# EAGLE board ArduRCT_Local-v4 (EAGLE 5.07)
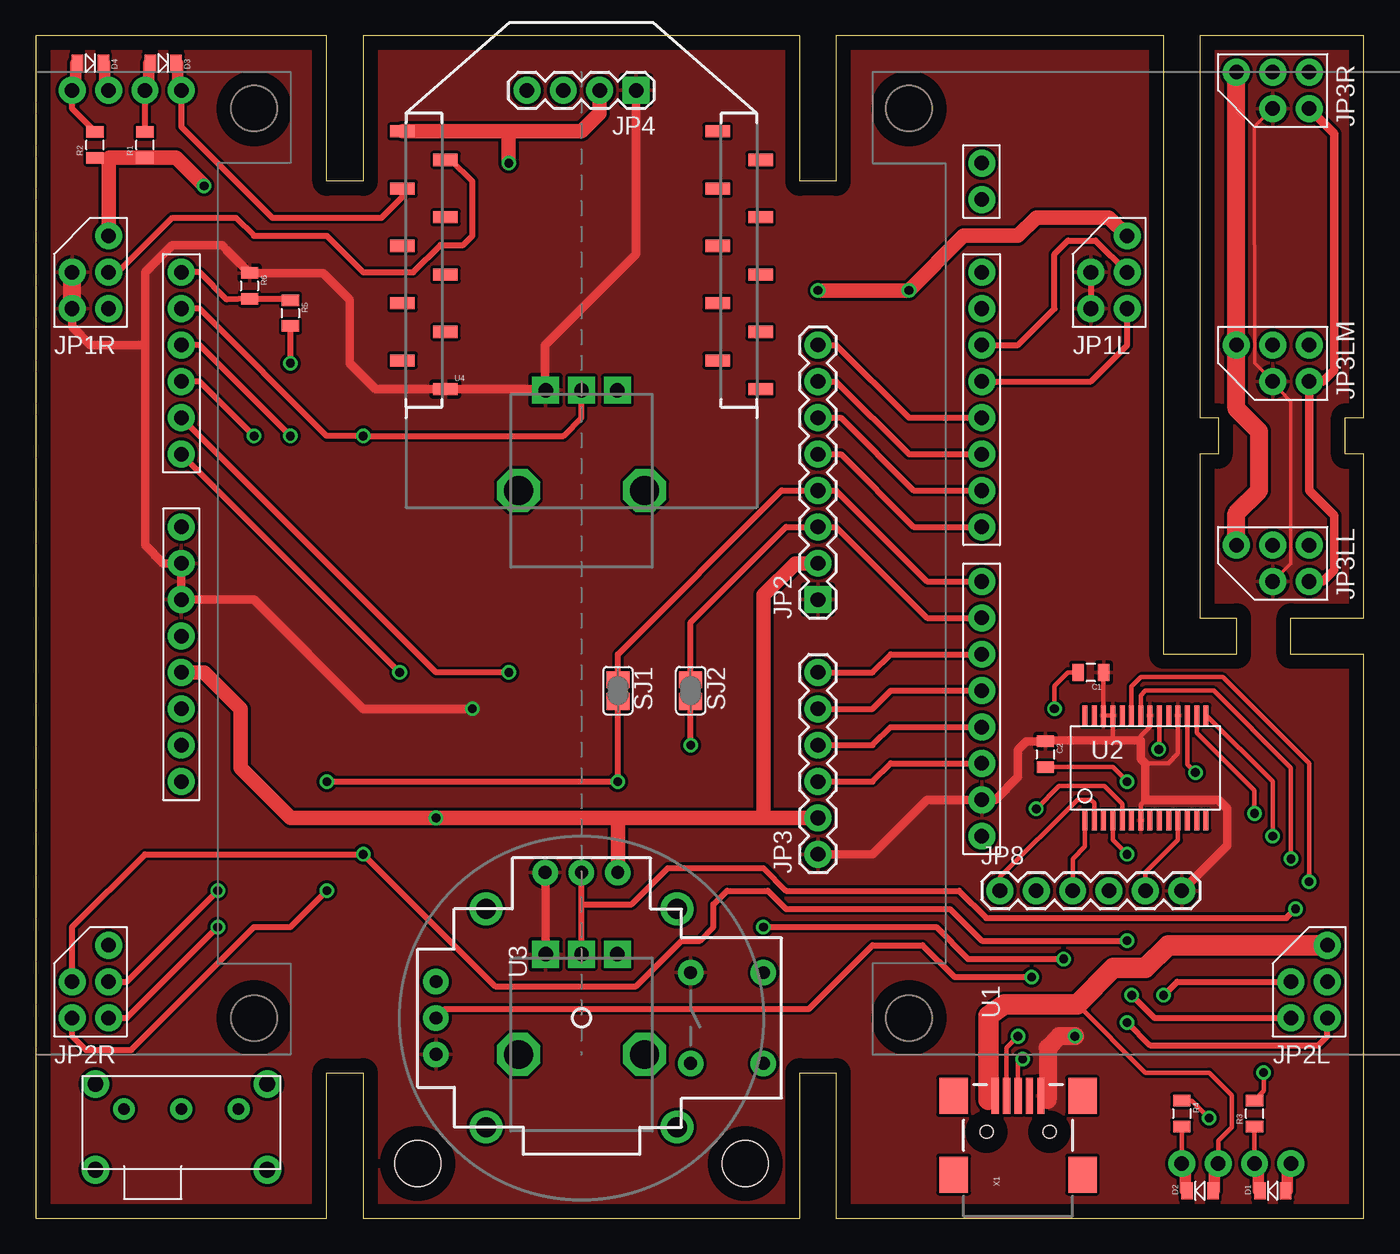
[diagram p0: board, top side]
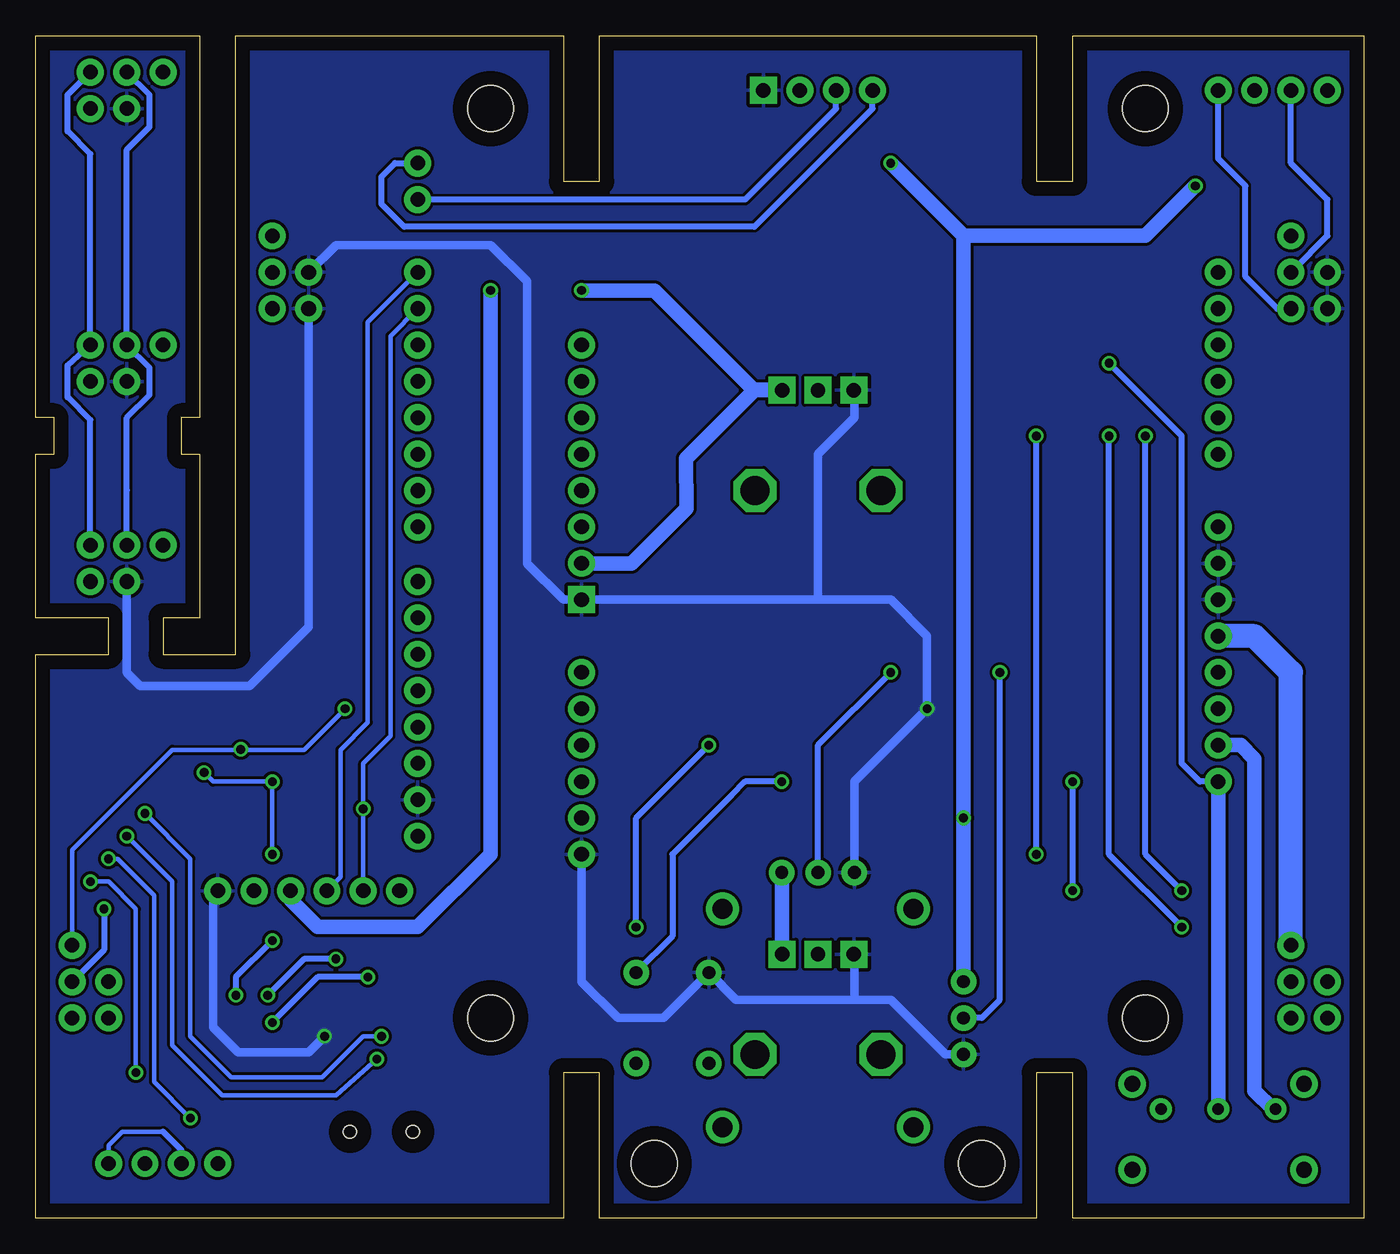
[diagram p1: board, bottom side, seen from below]

Size 92.71 x 82.55 mm. Coordinates in mm from the lower left corner, seen from the top.
Outline: 0,0 20.32,0 20.32,10.16 22.86,10.16 22.86,0 53.34,0 53.34,10.16 55.88,10.16 55.88,0 92.7,0 92.71,39.37 87.63,39.37 87.63,41.91 92.71,41.91 92.71,53.34 91.44,53.34 91.44,55.88 92.71,55.88 92.71,82.54 81.28,82.54 81.28,55.88 82.55,55.88 82.55,53.34 81.28,53.34 81.28,41.91 83.82,41.91 83.82,39.37 78.74,39.37 78.74,82.55 55.88,82.55 55.88,72.39 53.34,72.39 53.34,82.55 22.86,82.55 22.86,72.39 20.32,72.39 20.32,82.54 0,82.54 0,0
Copper layers (1*16): Top 0.035mm / dielectric 1.5mm / Bottom 0.035mm
Design rules "default": minimum track width 10mil, minimum drill 24mil, track to track 8mil, track to pad 8mil, pad to pad 8mil, via to via 8mil, smd to smd 8mil, copper to edge 40mil, drill to drill 8mil, minimum pad ring 10mil, minimum via ring 8mil, stop-mask expansion 4mil, vias tented up to drill 0mil, thermal gap 10mil
Net classes: 0 default: width 0.203 mm; 1 vcc: width 0.254 mm
Holes 3.2 mm at 15.24,13.97 60.96,13.97 60.96,77.47 15.24,77.47 49.53,3.81 26.67,3.81

## Footprints (pad centres in the part's own frame; a part is rotated, then mirrored left to right if it is on the bottom)
0805 = smd 0.8 x 1.2: 1 -0.9,0; 2 0.9,0
LED = smd 0.8 x 1.2: A -0.9,0; C 0.9,0 | drill 1.016 pad 1.88 round: A1 -1.27,-1.905; C1 1.27,-1.905
2+3 = drill 1.016 pad 1.88 round: 1 -1.27,0; 2 1.27,0; 3 1.27,2.54; 4 -1.27,2.54; 5 -3.81,2.54
1X08 = drill 1.016 pad 1.88 square: 1 0,0 | drill 1.016 pad 1.88 round: 2 2.54,0; 3 5.08,0; 4 7.62,0; 5 10.16,0; 6 12.7,0; 7 15.24,0; 8 17.78,0
1X06 = drill 1.016 pad 1.88 round: 1 0,0; 2 2.54,0; 3 5.08,0; 4 7.62,0; 5 10.16,0; 6 12.7,0
1X04 = drill 1.016 pad 1.88 square: 1 0,0 | drill 1.016 pad 1.88 round: 2 2.54,0; 3 5.08,0; 4 7.62,0
ALPS_POT = drill 1 pad 1.88 square: P$1 7,-2.5; P$2 7,0; P$3 7,2.5 | drill 2 octagon: P$4 0,-4.4; P$5 0,4.4
EG1224 = drill 0.8 pad 1.524 round: 1 -4,0; 2 0,0; 3 4,0 | drill 1.1 pad 1.93 round: P$4 6,1.75; P$5 -6,1.75; P$6 -6,-4.25; P$7 6,-4.25
SJ = smd 1.168 x 1.6: 1 -0.762,0; 2 0.762,0
ARDUTS_SHIELD_SPLIT = drill 1.016 pad 1.88 round: 3.3V -27.94,-8.89; 5V -27.94,-6.35; A0 -27.94,6.35; A1 -27.94,8.89; A2 -27.94,11.43; A3 -27.94,13.97; A4 -27.94,16.51; A5 -27.94,19.05; AREF 27.94,-20.32; D2 27.94,13.97; D3 27.94,11.43; D4 27.94,8.89; D5 27.94,6.35; D6 27.94,3.81; D7 27.94,1.27; D8 27.94,-2.54; D9 27.94,-5.08; D10 27.94,-7.62; D11 27.94,-10.16; D12 27.94,-12.7; D13 27.94,-15.24; D19 27.94,26.67; D20 27.94,24.13; GND@0 -27.94,-3.81; GND@1 -27.94,-1.27; GND@2 27.94,-17.78; RES -27.94,-11.43; RX 27.94,19.05; TX 27.94,16.51; V+ -27.94,-16.51; VBAT -27.94,-13.97; VIN -27.94,1.27
SSOP28DB = smd 0.348 x 1.397: 1 -4.225,-3.656; 2 -3.575,-3.656; 3 -2.925,-3.656; 4 -2.275,-3.656; 5 -1.625,-3.656; 6 -0.975,-3.656; 7 -0.325,-3.656; 8 0.325,-3.656; 9 0.975,-3.656; 10 1.625,-3.656; 11 2.275,-3.656; 12 2.925,-3.656; 13 3.575,-3.656; 14 4.225,-3.656; 15 4.225,3.656; 16 3.575,3.656; 17 2.925,3.656; 18 2.275,3.656; 19 1.625,3.656; 20 0.975,3.656; 21 0.325,3.656; 22 -0.325,3.656; 23 -0.975,3.656; 24 -1.625,3.656; 25 -2.275,3.656; 26 -2.925,3.656; 27 -3.575,3.656; 28 -4.225,3.656
JOYSTICK = drill 0.9 pad 1.778 round: B1A -3.175,12.7; B1B 3.175,12.7; B2A -3.175,7.62; B2B 3.175,7.62 | drill 0.889 pad 1.778 round: H1 -2.54,-10.16; H2 0,-10.16; H3 2.54,-10.16; V1 -10.16,2.54; V2 -10.16,0; V3 -10.16,-2.54 | drill 1.397 pad 2.286 round: MOUNT1 -7.62,6.668; MOUNT2 -7.62,-6.668; MOUNT3 7.62,-6.668; MOUNT4 7.62,6.668
XBEE-SMD = smd 1.7 x 0.85: 1 -12.5,20; 2 -9.5,18; 3 -12.5,16; 4 -9.5,14; 5 -12.5,12; 6 -9.5,10; 7 -12.5,8; 8 -9.5,6; 9 -12.5,4; 10 -9.5,2; 11 12.5,2; 12 9.5,4; 13 12.5,6; 14 9.5,8; 15 12.5,10; 16 9.5,12; 17 12.5,14; 18 9.5,16; 19 12.5,18; 20 9.5,20
USB-MINIB = smd 2.5 x 0.5: D+ 2.5,0; D- 2.5,0.8; GND 2.5,-1.6; ID 2.5,-0.8; VBUS 2.5,1.6 | smd 2.5 x 2: MTN1 -3,4.5; MTN2 2.5,4.5; MTN3 -3,-4.5; MTN4 2.5,-4.5 | hole 0.9: 0,2.2; 0,-2.2

## Placement (x,y rotation side)
C1  0.1uF  [0805]  73.66,38.1 180 top
C2  0.1uF  [0805]  70.48,32.38 270 top
D1  Green  [LED]  86.36,1.91 180 top
D2  Red  [LED]  81.28,1.91 180 top
D3  Red  [LED]  8.89,80.64 0 top
D4  Green  [LED]  3.81,80.64 0 top
JP1L  [2+3]  73.66,64.77 270 top
JP1R  [2+3]  2.54,64.77 270 top
JP2  [1X08]  54.61,43.18 90 top
JP2L  [2+3]  87.63,15.24 270 top
JP2R  [2+3]  2.54,15.24 270 top
JP3  [1X06]  54.61,25.4 90 top
JP3LL  [2+3]  87.63,44.45 0 top
JP3LM  [2+3]  87.63,58.42 0 top
JP3R  [2+3]  87.63,77.47 0 top
JP4  I2C  [1X04]  41.91,78.74 180 top
JP8  [1X06]  67.31,22.86 0 top
P1  [ALPS_POT]  38.1,11.43 90 top
P2  [ALPS_POT]  38.1,50.8 90 top
R1  1K  [0805]  7.62,74.93 90 top
R2  1K  [0805]  4.13,74.93 90 top
R3  1K  [0805]  85.09,7.3 90 top
R4  1K  [0805]  80.01,7.3 270 top
R5  10K  [0805]  17.78,63.18 270 top
R6  22K  [0805]  14.92,65.09 270 top
S4  EG1224  [EG1224]  10.16,7.62 0 top
SJ1  [SJ]  40.64,36.83 270 top
SJ2  [SJ]  45.72,36.83 270 top
U1  ARDUTS_SHIELD  [ARDUTS_SHIELD_SPLIT]  38.1,46.99 0 top
U2  FT232RL-BASICSSOP  [SSOP28DB]  77.47,31.43 0 top
U3  JOYSTICKPTH  [JOYSTICK]  38.1,13.97 270 top
U4  XBEE  [XBEE-SMD]  38.1,55.88 0 top
X1  USBSMD  [USB-MINIB]  68.58,6.03 90 top

## Library data of the parts
C1 C2 JP2-JP4 JP8 P1 P2 R1-R6 U3 X1 = SparkFun
D1-D4 JP1L JP1R JP2L JP2R JP3LL JP3LM JP3R S4 U1 U2 U4 = wibauxl
SJ1 SJ2 = jumper

## Nets
3.3V: JP1L.5 JP1R.5 JP2.2 JP3.2 JP4.2 JP8.4 P1.P$1 P2.P$1 R1.1 R2.1 U1.3.3V U3.H1 U3.V1 U4.1
_VUSB: JP2R.5 U1.5V
A0: JP2L.3 U1.A0 U3.H2
A1: JP2L.4 P1.P$2 U1.A1 U3.V2
A2: JP2R.4 U1.A2
A3: JP2R.3 U1.A3
A4: JP2L.1 JP2R.1 P2.P$2 U1.A4
A5: R5.1 R6.2 U1.A5
D4: JP2.8 U1.D4
D5: JP2.7 U1.D5
D6: JP2.6 U1.D6
D7: JP2.5 U1.D7
D8: JP2.4 SJ1.1 U1.D8
D9: JP2.3 SJ2.1 U1.D9
D10: JP3.6 U1.D10
GND [vcc]: C1.1 C2.1 JP1L.1 JP1L.2 JP1R.1 JP1R.2 JP2.1 JP3.1 JP3LL.1 JP3LM.1 JP3R.1 JP4.1 JP8.6 P1.P$3 P2.P$3 R6.1 U1.GND@0 U1.GND@1 U1.GND@2 U2.7 U2.18 U2.21 U2.25 U2.26 U3.B2A U3.H3 U3.V3 U4.10 X1.GND
MISO: JP3.4 U1.D12
MOSI: JP3.5 U1.D11
N$4: JP3LL.4 JP3LM.4 JP3R.4
N$5: JP3LL.3 JP3LM.3 JP3R.3
N$6: JP3LL.2 JP3LM.2 JP3R.2
N$7: JP3LL.5 JP3LM.5 JP3R.5
N$9: U2.15 X1.D+
N$10: U2.16 X1.D-
N$14: D3.A1 R1.2
N$18: R3.2 U2.23
N$19: C2.2 U2.4 U2.17
N$22: R4.1 U2.22
N$25: D4.A1 R2.2
RX1: JP1L.4 U1.D2
SCK: JP3.3 U1.D13
SCL: JP4.4 U1.D19
SDA: JP4.3 U1.D20
SEL0: JP2L.2 SJ2.2
SEL1: JP2R.2 SJ1.2 U3.B1A
TX1: JP1L.3 U1.D3
U_CTS: JP8.5 U2.11
U_DTR: JP8.1 U2.2
U_RX: JP8.2 U1.TX U2.5
U_RX_LED: D2.C1 R4.2
U_TX: JP8.3 U1.RX U2.1
U_TX_LED: D1.C1 R3.1
V+: R5.2 S4.2 U1.V+
VBAT: S4.1 U1.VBAT
VUSB: C1.2 D1.A1 D2.A1 JP2L.5 U2.20 X1.VBUS
X_RX: D3.C1 JP1R.3 U4.3
X_TX: D4.C1 JP1R.4 U4.2

## Tracks (layer width: path | path; a pad name or v marks a point on that pad's centre or on a via)
3.3V  (via drill 0.61)
  Top 0.406: 5.13,74.03 5.08,73.98
  Top 0.61: R1.1 R2.1 | 38.1,75.88 | 33.02,75.88
  Top 1.016: 5.13,74.03 R1.1 9.79,74.03 v11.75,72.07 | 5.08,73.98 JP1R.5 | U4.1 33.02,75.88 38.1,75.88 39.37,77.15 JP4.2 | v33.02,73.66 33.02,75.88 | JP1L.5 74.93,69.85 69.85,69.85 68.58,68.58 64.77,68.58 v60.96,64.77 v54.61,64.77 | U1.3.3V 11.75,38.1 14.29,35.56 14.29,31.43 17.78,27.94 v27.94,27.94 40.64,27.94 | 50.8,27.94 JP3.2 | 50.8,27.94 50.8,43.5 53.02,45.72 JP2.2 | 40.64,27.94 50.8,27.94 | 40.64,27.94 U3.V1
  Bottom 0.406: U3.V1 40.6,24.09
  Bottom 0.61: P2.P$1 40.64,57.84
  Bottom 1.016: v11.75,72.07 15.24,68.58 27.94,68.58 | 40.64,57.84 42.6,57.84 49.53,64.77 v54.61,64.77 | P2.P$1 42.53,57.8 47.31,53.02 47.29,49.55 51.12,45.72 JP2.2 | JP8.4 74.93,22.23 73.03,20.32 66.04,20.32 60.96,25.4 v60.96,64.77 | 40.6,19.09 40.64,18.41 | U3.H1 v27.94,27.94 27.94,68.58 | 40.6,19.09 P1.P$1 | 40.6,24.09 40.6,19.09 | 27.94,68.58 v33.02,73.66
_VUSB
  Bottom 1.676: U1.5V 7.62,40.64 5.08,38.1 JP2R.5
A0  (via drill 0.61)
  Top 0.406: JP2L.3 90.17,12.7 89.53,12.06 77.79,12.06 v76.2,13.65 | v69.53,16.83 64.14,16.83 61.91,19.05 58.42,19.05 53.98,14.61 28.57,14.61 U3.H2 | v25.4,38.1 U1.A0
  Bottom 0.406: v76.2,13.65 73.03,16.83 v69.53,16.83 | U3.H2 26.67,13.97 25.4,15.24 v25.4,38.1
A1  (via drill 0.61)
  Top 0.406: v87.95,21.59 87.31,20.95 66.36,20.95 64.45,22.86 52.39,22.86 50.8,24.45 44.13,24.45 41.59,21.91 38.1,21.91 | v33.02,38.1 27.94,38.1 U1.A1 | 38.1,21.91 U3.V2 | P1.P$2 38.1,21.91
  Bottom 0.406: JP2L.4 87.95,18.73 v87.95,21.59 | v33.02,38.1 38.1,33.02 U3.V2
A2  (via drill 0.61)
  Top 0.406: JP2R.4 6.35,16.51 v12.7,22.86 | U1.A2 11.43,58.42 v15.24,54.61
  Bottom 0.406: v12.7,22.86 15.24,25.4 v15.24,54.61
A3  (via drill 0.61)
  Top 0.406: JP2R.3 6.35,13.97 v12.7,20.32 | U1.A3 11.43,60.96 v17.78,54.61
  Bottom 0.406: v12.7,20.32 17.78,25.4 v17.78,54.61
A4  (via drill 0.61)
  Top 0.406: U1.A4 11.43,63.5 20.32,54.61 v22.86,54.61 36.83,54.61 38.1,55.88 P2.P$2 | JP2L.1 79.69,16.51 v78.74,15.56 | v76.2,19.37 66.04,19.37 63.82,21.59 52.39,21.59 51.12,22.86 48.26,22.86 47.31,21.91 47.31,20.32 46.35,19.37 45.09,19.37 41.91,16.19 32.07,16.19 v22.86,25.4 7.62,25.4 2.54,20.32 JP2R.1
  Bottom 0.406: v76.2,19.37 78.74,16.83 v78.74,15.56 | v22.86,25.4 v22.86,54.61
A5
  Top 0.406: U1.A5 11.43,66.04 13.34,64.14 R6.2 17.68,64.19 R5.1
D4
  Top 0.406: U1.D4 60.96,55.88 55.88,60.96 JP2.8
D5
  Top 0.406: U1.D5 60.96,53.34 55.88,58.42 JP2.7
D6
  Top 0.406: U1.D6 61.28,50.8 56.2,55.88 JP2.6
D7
  Top 0.406: U1.D7 61.28,48.26 56.2,53.34 JP2.5
D8
  Top 0.406: U1.D8 62.23,44.45 55.88,50.8 JP2.4 52.07,50.8 40.64,39.37 SJ1.1
D9
  Top 0.406: U1.D9 62.23,41.91 55.88,48.26 JP2.3 52.39,48.26 45.72,41.59 SJ2.1
D10
  Top 0.406: U1.D10 59.69,39.37 58.42,38.1 JP3.6
GND  (via drill 0.61)
  Top 0.254: JP3R.1 85.09,76.2 85.09,59.69 JP3LM.1 87.63,56.99 87.63,45.72 JP3LL.1
  Top 0.305: 77.15,33.34 77.15,33.66 77.8,34.3 U2.21 | U2.18 79.75,32.44 79.06,31.75 77.48,31.75 77.47,31.75 | U2.7 77.14,28.89 77.47,29.21 | C2.1 70.54,33.34 | 75.25,33.34 75.19,33.39 U2.25 U2.26 74.55,38.12 C1.1 | X1.GND 70.44,8.53 70.64,8.26
  Top 0.406: JP1L.1 JP1L.2 | 35.6,24.09 U3.V3
  Top 0.61: JP8.6 83.19,26.04 83.19,28.57 82.55,29.21 77.47,29.21 77.48,30.17 77.48,31.75 | 7.62,60.96 7.62,66.04 9.53,67.94 13.02,67.94 13.28,67.63 R6.1 20.05,65.99 21.91,64.14 21.91,59.69 23.72,57.88 U4.10 35.52,57.88 P2.P$3 35.56,57.84 35.56,60.96 41.91,67.31 JP4.1 | 7.62,60.96 3.81,60.96 2.54,62.23 JP1R.2 | 77.47,31.75 77.15,32.07 77.15,33.34 75.25,33.34 70.54,33.34 | C2.1 69.16,33.28 68.58,32.7 68.58,30.8 66.99,29.21 U1.GND@2 62.23,29.21 58.42,25.4 JP3.1 | P1.P$3 35.6,24.09 | 7.62,60.96 7.62,46.99 8.89,45.72 U1.GND@1 10.16,44.13 U1.GND@0 15.24,43.18 22.86,35.56 v30.48,35.56
  Top 1.27: JP1R.2 JP1R.1 | 70.64,8.26 70.64,11.91 71.44,12.7 v72.55,12.7
  Bottom 0.406: 35.56,18.39 P1.P$3 35.6,15.28 35.56,15.24
  Bottom 0.61: JP3LL.1 86.36,38.1 85.41,37.15 77.79,37.15 73.66,41.27 JP1L.2 | v72.55,12.7 | v72.55,12.7 73.66,11.59 78.58,11.59 80.33,13.34 80.33,22.54 JP8.6 | JP1L.1 71.75,67.94 60.96,67.94 58.42,65.41 58.42,45.72 55.88,43.18 JP2.1 38.1,43.18 | JP3.1 54.61,16.51 52.07,13.97 48.9,13.97 U3.B2A 43.81,15.24 35.56,15.24 | 35.56,15.24 35.56,18.39 | 35.56,15.24 33.02,15.24 29.21,11.43 U3.H3 | P2.P$3 35.56,57.76 35.56,55.88 38.1,53.34 38.1,43.18 | U3.V3 35.56,30.48 v30.48,35.56 30.48,40.64 33.02,43.18 38.1,43.18
  pour Top: 0,82.55 92.71,82.55 92.71,0 0,0
  pour Bottom: 0,82.55 92.71,82.55 92.71,0 0,0
MISO
  Top 0.406: JP3.4 58.42,33.02 59.69,34.29 U1.D12
MOSI
  Top 0.406: JP3.5 58.42,35.56 59.69,36.83 U1.D11
N$4
  Bottom 0.406: JP3R.4 84.77,78.42 84.77,76.2 86.36,74.61 JP3LM.4 84.77,59.37 84.77,57.47 86.36,55.88 86.36,50.8 JP3LL.4
N$5
  Bottom 0.406: JP3R.3 90.49,78.42 90.49,75.88 88.9,74.3 JP3LM.3 90.49,59.53 90.49,57.31 88.9,55.72 JP3LL.3
N$6
  Top 0.61: JP3LL.2 89.85,44.45 90.65,45.24 90.65,49.05 88.9,50.8 88.9,55.88 88.9,56.99 88.9,57.94 JP3LM.2 89.85,58.42 90.65,59.21 90.65,75.72 JP3R.2
N$7
  Top 1.27: JP3LL.5 83.82,49.21 85.41,50.8 85.41,54.93 83.82,56.52 JP3LM.5 JP3R.5
N$9  (via drill 0.61)
  Top 0.305: U2.15 81.69,35.15 86.36,30.48 v86.36,26.67 | X1.D+ 68.58,11.11 v68.9,11.11
  Bottom 0.305: v86.36,26.67 83.19,23.5 83.19,12.06 79.69,8.57 71.75,8.57 v68.9,11.11
N$10  (via drill 0.61)
  Top 0.305: U2.16 81.05,33.89 85.09,29.84 v85.09,28.26 | X1.D- 67.78,11.9 v68.57,12.69
  Bottom 0.305: v85.09,28.26 81.92,25.08 81.92,12.7 79.06,9.84 72.71,9.84 69.85,12.7 69.22,12.7 v68.57,12.69
N$14
  Top 0.406: R1.2 D3.A1
N$18  (via drill 0.61)
  Top 0.305: U2.23 76.5,37.12 77.15,37.78 82.87,37.78 88.9,31.75 v88.9,23.5 | R3.2 85.72,8.89 v85.72,10.16
  Bottom 0.305: v88.9,23.5 87.63,23.5 85.72,21.59 v85.72,10.16
N$19  (via drill 0.61)
  Top 0.305: C2.2 75.19,31.48 v76.2,30.48 | U2.4 75.19,26.41 v76.2,25.4 | U2.17 80.39,31.66 v80.96,31.11
  Bottom 0.305: v80.96,31.11 80.33,30.48 v76.2,30.48 v76.2,25.4
N$22  (via drill 0.61)
  Top 0.305: U2.22 77.14,36.51 77.47,36.83 82.23,36.83 87.63,31.43 v87.63,25.08 | R4.1 80.7,8.2 v81.92,6.99
  Bottom 0.305: v81.92,6.99 84.45,9.53 84.45,22.54 87,25.08 v87.63,25.08
N$25
  Top 0.406: R2.2 4.13,75.88 2.54,77.47 D4.A1
RX1
  Top 0.406: U1.D2 68.58,60.96 71.12,63.5 71.12,67.31 72.07,68.26 73.98,68.26 JP1L.4
SCK
  Top 0.406: JP3.3 58.42,30.48 59.69,31.75 U1.D13
SCL
  Bottom 0.406: JP4.4 34.29,77.47 42.55,69.22 66.99,69.22 68.58,70.8 68.58,72.71 67.63,73.66 U1.D19
SDA
  Bottom 0.406: JP4.3 36.83,77.47 43.18,71.12 U1.D20
SEL0  (via drill 0.61)
  Top 0.406: JP2L.2 78.11,13.97 v76.52,15.56 | v71.75,18.1 65.09,18.1 62.87,20.32 v50.8,20.32 | v45.72,33.02 SJ2.2
  Bottom 0.406: v76.52,15.56 73.98,18.1 v71.75,18.1 | v50.8,20.32 50.8,27.94 v45.72,33.02
SEL1  (via drill 0.61)
  Top 0.406: SJ1.2 v40.64,30.48 v20.32,30.48 | JP2R.2 2.54,12.7 3.49,11.75 6.67,11.75 15.24,20.32 17.78,20.32 v20.32,22.86
  Bottom 0.406: v40.64,30.48 43.18,30.48 44.13,29.53 48.26,25.4 48.26,19.68 U3.B1A | v20.32,22.86 v20.32,30.48
TX1
  Top 0.406: U1.D3 73.66,58.42 75.56,60.33 76.2,60.96 JP1L.3
U_CTS
  Top 0.305: U2.11 79.75,26.41 77.47,24.13 JP8.5
U_DTR
  Top 0.305: U2.2 73.89,28.98 73.66,29.21 72.71,29.21 67.31,23.81 JP8.1
U_RX  (via drill 0.61)
  Top 0.305: U2.5 75.84,28.93 74.61,30.16 71.44,30.16 v69.85,28.57
  Bottom 0.305: JP8.2 v69.85,28.57 69.85,31.75 67.94,33.66 67.94,61.59 U1.TX
U_RX_LED
  Top 0.305: D2.C1 R4.2
U_TX
  Top 0.305: U2.1 73.25,25.94 72.39,25.08 JP8.3
  Bottom 0.305: JP8.3 71.44,23.81 71.44,32.7 69.53,34.61 69.53,62.55 U1.RX
U_TX_LED
  Top 0.305: D1.C1 R3.1
V+  (via drill 0.61)
  Top 0.406: v17.78,59.69 R5.2
  Bottom 0.406: v17.78,59.69 12.7,54.61 12.7,31.75 11.43,30.48 U1.V+
  Bottom 1.016: S4.2 U1.V+
VBAT
  Bottom 0.61: S4.1 6.35,7.62
  Bottom 1.016: 6.35,7.62 7.62,8.89 7.62,32.07 8.57,33.02 U1.VBAT
VUSB  (via drill 0.61)
  Top 0.305: U2.20 78.44,33.04 v78.4,32.73 | X1.VBUS 66.72,8.53 66.52,8.26 | v71.12,35.56 71.12,37.15 72.07,38.1 C1.2 | D2.A1 82.55,5.4 83.5,6.35 83.5,8.57 81.92,10.16 77.47,10.16 72.71,14.92
  Top 1.422: 66.52,8.26 66.52,14.13 67.63,14.92 72.71,14.92 75.25,17.46 77.47,17.46 79.06,19.05 JP2L.5
  Bottom 0.305: JP2L.5 90.17,25.72 83.19,32.7 78.42,32.7 | v71.12,35.56 73.98,32.7 78.42,32.7 | 83.82,6.03 86.68,6.03 87.63,5.08 D1.A1 | 78.42,32.7 v78.4,32.73
  Bottom 0.406: 83.82,6.03 82.55,4.76 D2.A1
X_RX
  Top 0.406: U4.3 25.6,71.32 24.13,69.85 16.51,69.85 10.16,76.2 D3.C1
  Bottom 0.406: D3.C1 10.16,73.98 8.26,72.07 8.26,65.72 6.03,63.5 JP1R.3
X_TX
  Top 0.406: U4.2 28.99,73.88 30.48,72.39 30.48,68.58 29.84,67.94 28.26,67.94 26.35,66.04 22.86,66.04 20.32,68.58 15.24,68.58 13.97,69.85 9.53,69.85 5.71,66.04 JP1R.4
  Bottom 0.406: D4.C1 5.08,73.66 2.54,71.12 2.54,68.58 4.92,66.2 JP1R.4